# Altium PCB main_old.PcbDoc (part 13 of 15)
Units mil, origin at the board's own origin, x right, y up, seen from the top; angles counter-clockwise.
Board outline 8394.55 x 5164.44 mil, 7 copper layers (Top Layer 1, Layer 2, Layer 3, Unused, Layer 4_pow, Layer 5_gnd, Bottom 6+gnd), stack 46.112 mil thick; 363 components, 409 nets, 1750 pads, 991 vias.
Unrouted connection lines stored in the file: 1.
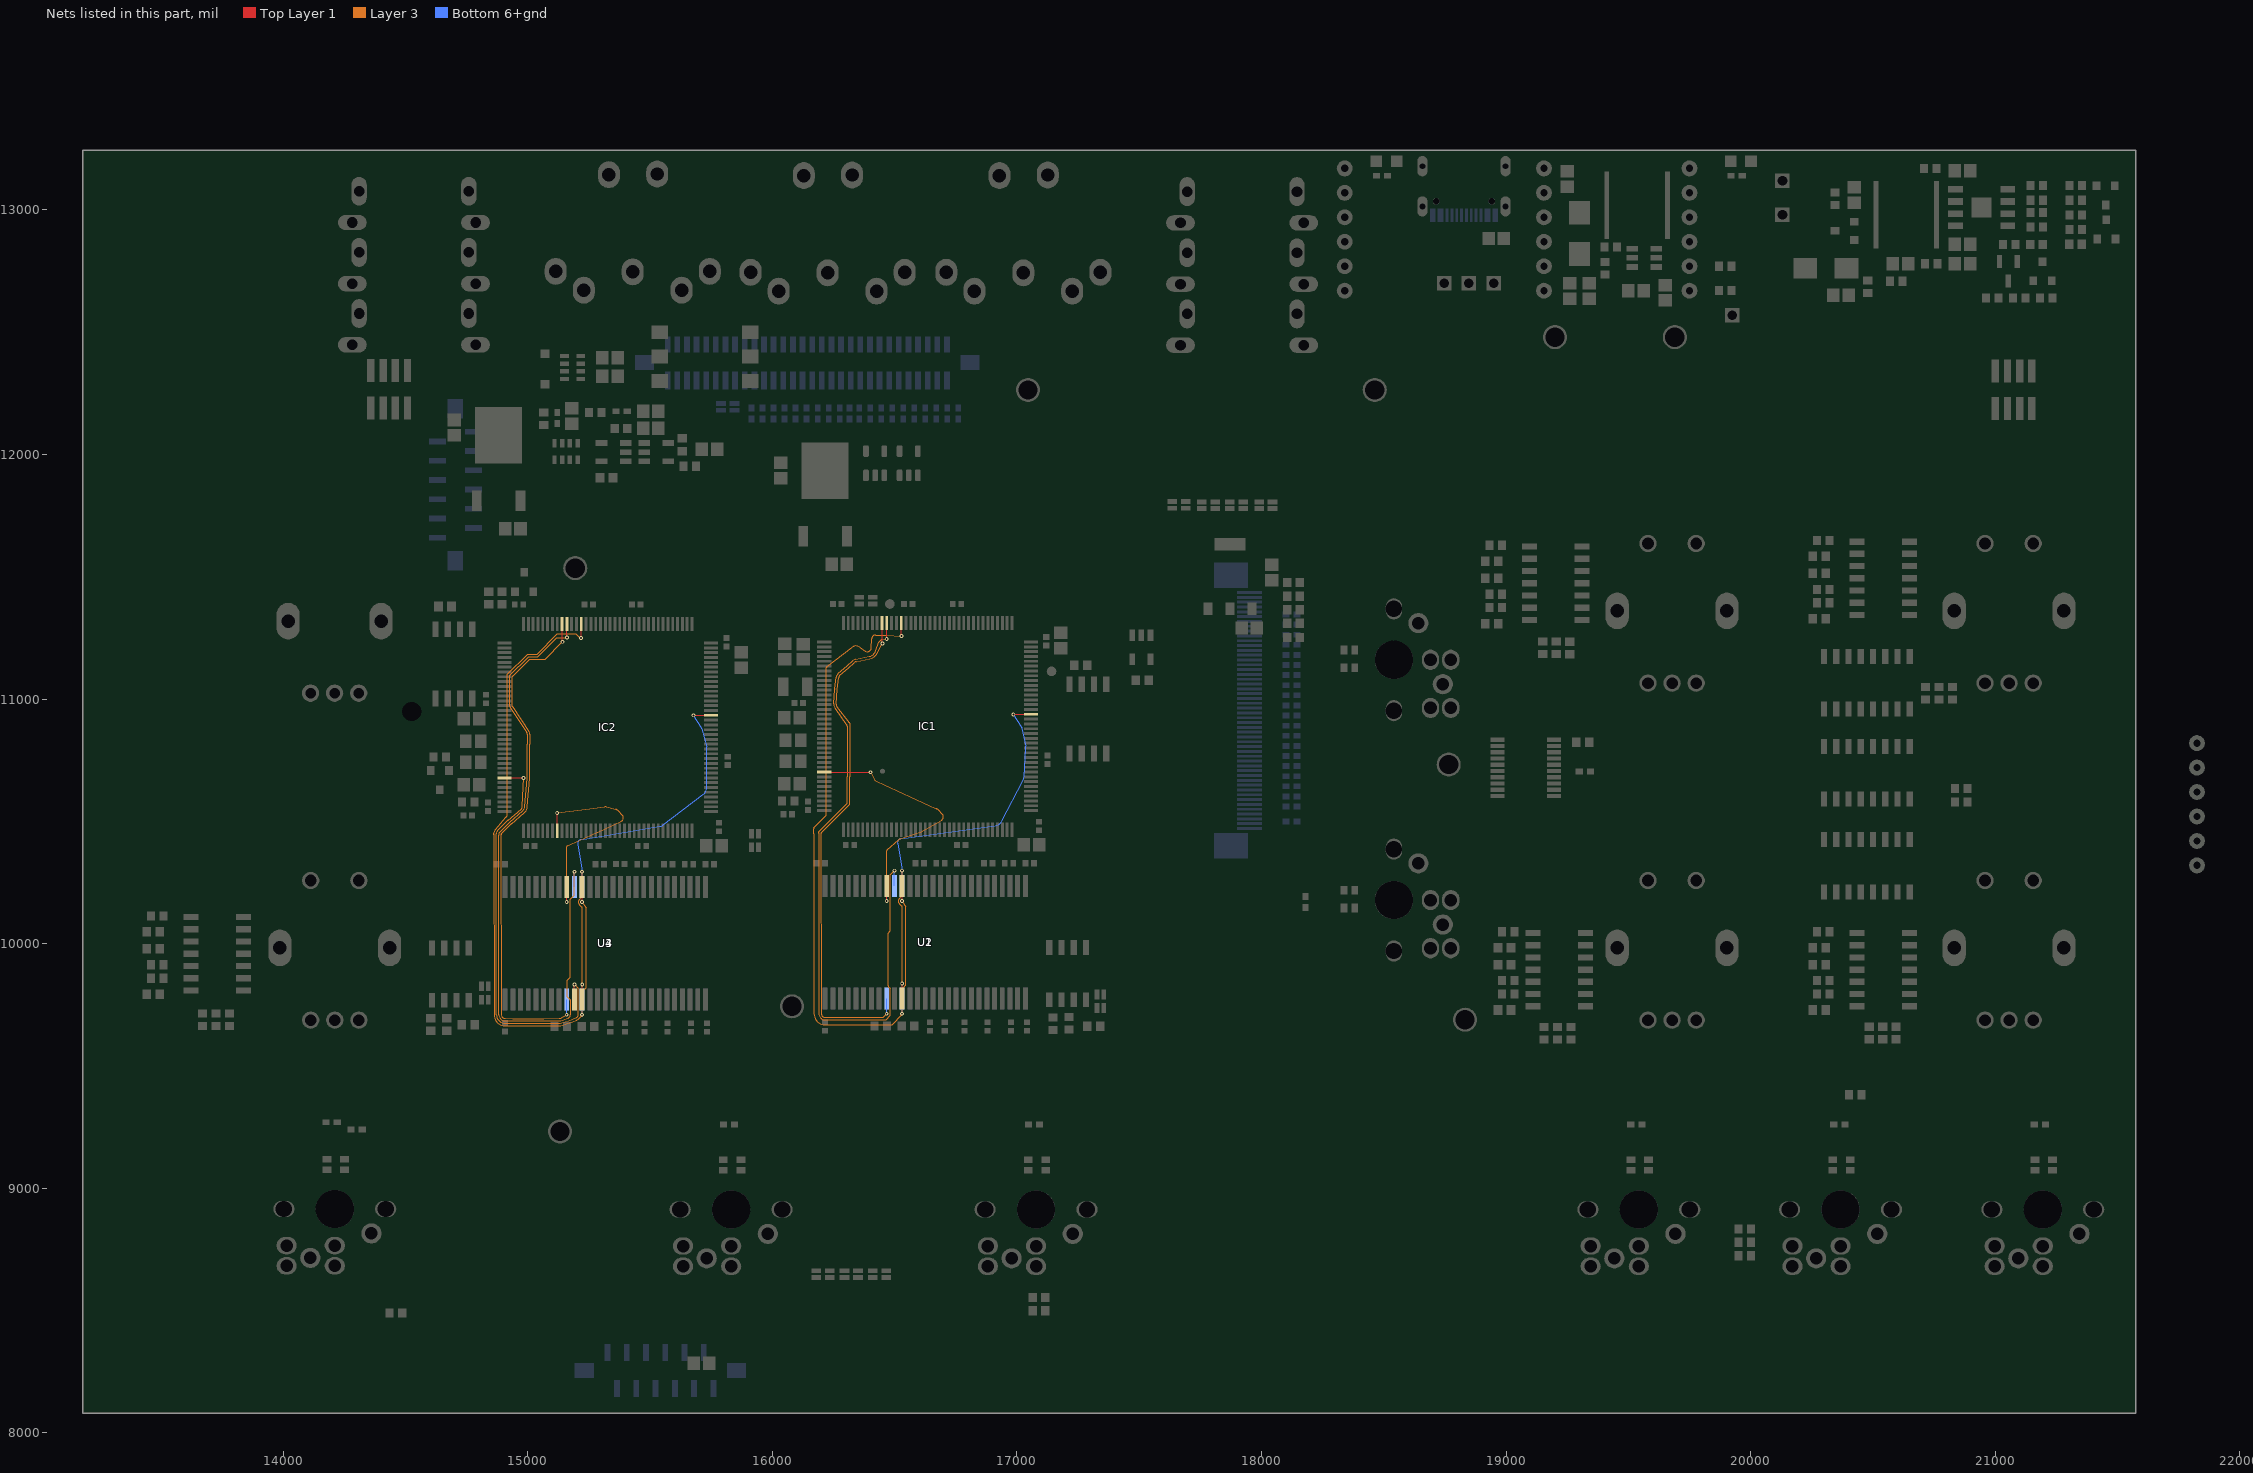
[diagram p16: the nets of this part, all layers, seen from the top]

## Via types
v1: diameter 15.75, hole 7.87, Top Layer 1 to Bottom 6+gnd, tented both sides, 923 vias
v2: diameter 27.56, hole 11.81, Top Layer 1 to Bottom 6+gnd, 45 vias
v3: diameter 23.62/23.62/23.62/23.62/23.62/23.62/23.62 (per signal layer), hole 12, Top Layer 1 to Bottom 6+gnd, tented top, 10 vias
v4: diameter 15.75, hole 7.87, Top Layer 1 to Bottom 6+gnd, 10 vias
v5: diameter 23.62/23.62/23.62/23.62/23.62/23.62/23.62 (per signal layer), hole 12, Top Layer 1 to Bottom 6+gnd, tented bottom, 3 vias

## Nets (pads, with @x,y where several pads share a name; then routed paths per layer and width w, separated by ;. In a path a pad name is that pad's centre, name@x,y a point inside that pad or via, vN(x,y) a via of type N, cw(c..) or ccw(c..) an arc to the next point about the centre after c; other vN are vias at no path point) (continued)
SDCKE_1_6: IC1.135 U2.37 | length 4722.9
  Top Layer 1 w5: v1(16467.42,11246.07) 16467.55,11246.2 16467.55,11311.45 IC1.135@16467.68,11311.57
  Layer 3 w5: 16190.01,10458.03 16304.92,10572.94 ; 16305.42,11136.34 16269.33,11104.85 ; 16305.43,11136.34 16328.74,11156.63 cw(c16345.4,11137.5) 16340.04,11162.3 16396.41,11174.48 ; 16306.39,10682.18 cw(c16291.01,10682.09) 16306.39,10681.99 ; 16465.11,9689.59 16482.65,9707.13 16482.65,9814.04 ; v1(16467.42,11246.07) 16447.1,11242.36 ccw(c16449.86,11227.24) 16435.46,11232.6 16422.09,11196.71 ; 16472.91,9827.93 ccw(c16477.91,9827.93) 16474.36,9824.4 ; v1(16498.77,10298.31) 16482.65,10282.18 16482.65,10052.46 16472.91,10042.72 16472.91,9827.92 ; 16188.55,10450.32 cw(c16198.55,10450.34) 16188.55,10450.45 ; 16188.55,10450.32 cw(c16198.55,10450.34) 16188.55,10450.45 ; 16188.55,10450.32 cw(c16198.55,10450.34) 16188.55,10450.45 ; 16188.55,10450.32 cw(c16198.55,10450.34) 16188.55,10450.45 ; 16188.55,10450.32 cw(c16198.55,10450.34) 16188.55,10450.45 ; 16188.55,10450.32 cw(c16198.55,10450.34) 16188.55,10450.45 ; 16188.55,10450.32 cw(c16198.55,10450.34) 16188.55,10450.45 ; 16188.55,10450.32 cw(c16198.55,10450.34) 16188.55,10450.45 ; 16188.55,10450.32 16190.05,9713.56 ; 16188.55,10450.45 16188.57,10454.56 ; 16188.57,10454.56 cw(c16193.57,10454.52) 16189.99,10458 ; 16188.57,10454.56 cw(c16193.57,10454.52) 16189.99,10458 ; 16188.57,10454.56 cw(c16193.57,10454.52) 16189.99,10458 ; 16188.57,10454.56 cw(c16193.57,10454.52) 16189.99,10458 ; 16188.57,10454.56 cw(c16193.57,10454.52) 16189.99,10458 ; 16188.57,10454.56 cw(c16193.57,10454.52) 16189.99,10458 ; 16188.57,10454.56 cw(c16193.57,10454.52) 16189.99,10458.01 ; 16188.57,10454.56 cw(c16193.57,10454.52) 16189.99,10458 ; 16188.57,10454.56 cw(c16193.57,10454.52) 16189.99,10458 ; 16188.57,10454.56 cw(c16193.57,10454.52) 16189.99,10458 ; 16188.57,10454.56 cw(c16193.57,10454.52) 16189.99,10458 ; 16188.57,10454.56 cw(c16193.57,10454.52) 16189.99,10458 ; 16188.57,10454.56 cw(c16193.57,10454.52) 16189.99,10458 ; 16188.57,10454.56 cw(c16193.57,10454.52) 16189.99,10458 ; 16188.57,10454.56 cw(c16193.57,10454.52) 16189.99,10458 ; 16188.57,10454.56 cw(c16193.57,10454.52) 16189.99,10458 ; 16190.05,9713.57 ccw(c16215.42,9713.62) 16215.32,9688.24 ; 16190.05,9713.57 ccw(c16215.42,9713.62) 16215.32,9688.24 ; 16190.05,9713.57 ccw(c16215.42,9713.62) 16215.32,9688.24 ; 16190.05,9713.57 ccw(c16215.42,9713.62) 16215.32,9688.24 ; 16190.05,9713.57 ccw(c16215.42,9713.62) 16215.32,9688.24 ; 16190.05,9713.57 ccw(c16215.42,9713.62) 16215.32,9688.24 ; 16190.05,9713.57 ccw(c16215.42,9713.62) 16215.32,9688.24 ; 16190.05,9713.57 ccw(c16215.42,9713.62) 16215.32,9688.24 ; 16190.05,9713.57 ccw(c16215.42,9713.62) 16215.32,9688.24 ; 16190.05,9713.57 ccw(c16215.42,9713.62) 16215.32,9688.24 ; 16190.05,9713.57 ccw(c16215.42,9713.62) 16215.32,9688.24 ; 16190.05,9713.57 ccw(c16215.42,9713.62) 16215.32,9688.24 ; 16190.05,9713.57 ccw(c16215.42,9713.62) 16215.32,9688.24 ; 16190.05,9713.57 ccw(c16215.42,9713.62) 16215.32,9688.24 ; 16190.05,9713.57 ccw(c16215.42,9713.62) 16215.32,9688.24 ; 16190.05,9713.57 ccw(c16215.42,9713.62) 16215.32,9688.24 ; 16215.32,9688.24 16246.73,9688.13 16449.84,9688.13 16461.61,9688.16 ; 16250.74,10980.39 ccw(c16276.06,10978.64) 16255.27,10964.09 ; 16250.74,10980.39 ccw(c16276.06,10978.64) 16255.27,10964.09 ; 16250.74,10980.39 ccw(c16276.06,10978.64) 16255.27,10964.09 ; 16250.74,10980.39 ccw(c16276.06,10978.64) 16255.27,10964.09 ; 16250.74,10980.39 ccw(c16276.06,10978.64) 16255.27,10964.09 ; 16250.74,10980.39 ccw(c16276.06,10978.64) 16255.27,10964.09 ; 16250.74,10980.39 ccw(c16276.06,10978.64) 16255.27,10964.09 ; 16250.74,10980.39 ccw(c16276.06,10978.64) 16255.27,10964.09 ; 16250.74,10980.39 ccw(c16276.06,10978.64) 16255.27,10964.09 ; 16250.74,10980.39 ccw(c16276.06,10978.64) 16255.27,10964.09 ; 16250.74,10980.39 ccw(c16276.06,10978.64) 16255.27,10964.09 ; 16250.74,10980.39 ccw(c16276.06,10978.64) 16255.27,10964.09 ; 16250.74,10980.39 ccw(c16276.06,10978.64) 16255.27,10964.09 ; 16250.74,10980.39 ccw(c16276.06,10978.64) 16255.27,10964.09 ; 16250.74,10980.39 ccw(c16276.06,10978.64) 16255.27,10964.09 ; 16250.74,10980.39 ccw(c16276.06,10978.64) 16255.27,10964.09 ; 16250.74,10980.39 16254.91,11040.51 cw(c16290.2,11038.08) 16255.09,11042.42 16260.83,11088.82 ; 16255.27,10964.09 16304.45,10893.68 ccw(c16308.57,10896.51) 16304.96,10893.05 cw(c16301.34,10889.6) 16306.34,10889.6 16306.39,10682.17 ; 16260.83,11088.82 cw(c16286.01,11085.73) 16269.33,11104.85 ; 16260.83,11088.82 cw(c16286.01,11085.73) 16269.33,11104.85 ; 16260.83,11088.82 cw(c16286.01,11085.73) 16269.33,11104.85 ; 16260.83,11088.82 cw(c16286.01,11085.73) 16269.33,11104.85 ; 16260.83,11088.82 cw(c16286.01,11085.73) 16269.33,11104.85 ; 16260.83,11088.82 cw(c16286.01,11085.73) 16269.33,11104.85 ; 16260.83,11088.82 cw(c16286.01,11085.73) 16269.33,11104.85 ; 16260.83,11088.82 cw(c16286.01,11085.73) 16269.33,11104.85 ; 16260.83,11088.82 cw(c16286.01,11085.73) 16269.33,11104.85 ; 16260.83,11088.82 cw(c16286.01,11085.73) 16269.33,11104.85 ; 16260.83,11088.82 cw(c16286.01,11085.73) 16269.33,11104.85 ; 16260.83,11088.82 cw(c16286.01,11085.73) 16269.33,11104.85 ; 16260.83,11088.82 cw(c16286.01,11085.73) 16269.33,11104.85 ; 16260.83,11088.82 cw(c16286.01,11085.73) 16269.33,11104.85 ; 16260.83,11088.82 cw(c16286.01,11085.73) 16269.33,11104.85 ; 16260.83,11088.82 cw(c16286.01,11085.73) 16269.33,11104.85 ; 16304.95,10572.97 ccw(c16301.35,10576.44) 16306.35,10576.44 ; 16304.95,10572.97 ccw(c16301.35,10576.44) 16306.35,10576.44 ; 16304.95,10572.97 ccw(c16301.35,10576.44) 16306.35,10576.44 ; 16304.95,10572.97 ccw(c16301.35,10576.44) 16306.35,10576.44 ; 16304.95,10572.97 ccw(c16301.35,10576.44) 16306.35,10576.44 ; 16304.95,10572.97 ccw(c16301.35,10576.44) 16306.35,10576.44 ; 16304.95,10572.97 ccw(c16301.35,10576.44) 16306.35,10576.44 ; 16304.95,10572.97 ccw(c16301.35,10576.44) 16306.35,10576.44 ; 16304.95,10572.97 ccw(c16301.35,10576.44) 16306.35,10576.44 ; 16304.95,10572.97 ccw(c16301.35,10576.44) 16306.35,10576.44 ; 16304.95,10572.97 ccw(c16301.35,10576.44) 16306.35,10576.44 ; 16304.95,10572.97 ccw(c16301.35,10576.44) 16306.35,10576.44 ; 16304.95,10572.97 ccw(c16301.35,10576.44) 16306.35,10576.44 ; 16304.95,10572.97 ccw(c16301.35,10576.44) 16306.35,10576.44 ; 16304.95,10572.97 ccw(c16301.35,10576.44) 16306.35,10576.44 ; 16304.95,10572.97 ccw(c16301.35,10576.44) 16306.35,10576.44 ; 16306.35,10576.44 16306.39,10681.99 ; 16306.39,10681.99 ccw(c16291.01,10682.09) 16306.39,10682.17 ; 16306.39,10681.99 ccw(c16291.01,10682.09) 16306.39,10682.17 ; 16306.39,10681.99 ccw(c16291.01,10682.09) 16306.39,10682.17 ; 16306.39,10681.99 ccw(c16291.01,10682.09) 16306.39,10682.17 ; 16306.39,10681.99 ccw(c16291.01,10682.09) 16306.39,10682.17 ; 16306.39,10681.99 ccw(c16291.01,10682.09) 16306.39,10682.17 ; 16306.39,10681.99 ccw(c16291.01,10682.09) 16306.39,10682.17 ; 16306.39,10681.99 ccw(c16291.01,10682.09) 16306.39,10682.17 ; 16306.39,10681.99 ccw(c16291.01,10682.09) 16306.39,10682.17 ; 16306.39,10681.99 ccw(c16291.01,10682.09) 16306.39,10682.17 ; 16306.39,10681.99 ccw(c16291.01,10682.09) 16306.39,10682.17 ; 16306.39,10681.99 ccw(c16291.01,10682.09) 16306.39,10682.17 ; 16306.39,10681.99 ccw(c16291.01,10682.09) 16306.39,10682.17 ; 16306.39,10681.99 ccw(c16291.01,10682.09) 16306.39,10682.17 ; 16306.39,10681.99 ccw(c16291.01,10682.09) 16306.39,10682.17 ; 16396.41,11174.48 ccw(c16388.94,11209.06) 16422.09,11196.71 ; 16396.41,11174.48 ccw(c16388.94,11209.06) 16422.09,11196.71 ; 16396.41,11174.48 ccw(c16388.94,11209.06) 16422.09,11196.71 ; 16396.41,11174.48 ccw(c16388.94,11209.06) 16422.09,11196.71 ; 16396.41,11174.48 ccw(c16388.94,11209.06) 16422.09,11196.71 ; 16396.41,11174.48 ccw(c16388.94,11209.06) 16422.09,11196.71 ; 16396.41,11174.48 ccw(c16388.94,11209.06) 16422.09,11196.71 ; 16396.41,11174.48 ccw(c16388.94,11209.06) 16422.09,11196.71 ; 16396.41,11174.48 ccw(c16388.94,11209.06) 16422.09,11196.71 ; 16396.41,11174.48 ccw(c16388.94,11209.06) 16422.09,11196.71 ; 16396.41,11174.48 ccw(c16388.94,11209.06) 16422.09,11196.71 ; 16396.41,11174.48 ccw(c16388.94,11209.06) 16422.09,11196.71 ; 16396.41,11174.48 ccw(c16388.94,11209.06) 16422.09,11196.71 ; 16396.41,11174.48 ccw(c16388.94,11209.06) 16422.09,11196.71 ; 16396.41,11174.48 ccw(c16388.94,11209.06) 16422.09,11196.71 ; 16396.41,11174.48 ccw(c16388.94,11209.06) 16422.09,11196.71 ; 16461.61,9688.16 ccw(c16461.6,9693.16) 16465.08,9689.57 ; 16461.61,9688.16 ccw(c16461.6,9693.16) 16465.08,9689.57 ; 16461.61,9688.16 ccw(c16461.6,9693.16) 16465.08,9689.57 ; 16461.61,9688.16 ccw(c16461.6,9693.16) 16465.08,9689.57 ; 16461.61,9688.16 ccw(c16461.6,9693.16) 16465.08,9689.57 ; 16461.61,9688.16 ccw(c16461.6,9693.16) 16465.08,9689.57 ; 16461.61,9688.16 ccw(c16461.6,9693.16) 16465.08,9689.57 ; 16461.61,9688.16 ccw(c16461.6,9693.16) 16465.08,9689.57 ; 16461.61,9688.16 ccw(c16461.6,9693.16) 16465.08,9689.57 ; 16461.61,9688.16 ccw(c16461.6,9693.16) 16465.08,9689.57 ; 16461.61,9688.16 ccw(c16461.6,9693.16) 16465.08,9689.57 ; 16461.61,9688.16 ccw(c16461.6,9693.16) 16465.08,9689.57 ; 16461.61,9688.16 ccw(c16461.6,9693.16) 16465.08,9689.57 ; 16461.61,9688.16 ccw(c16461.6,9693.16) 16465.08,9689.57 ; 16461.61,9688.16 ccw(c16461.6,9693.16) 16465.08,9689.57 ; 16461.61,9688.16 ccw(c16461.6,9693.16) 16465.08,9689.57 ; 16472.91,9827.92 ccw(c16477.91,9827.93) 16474.36,9824.4 ; 16472.91,9827.92 ccw(c16477.91,9827.93) 16474.36,9824.4 ; 16472.91,9827.92 ccw(c16477.91,9827.93) 16474.36,9824.4 ; 16472.91,9827.92 ccw(c16477.91,9827.93) 16474.36,9824.4 ; 16472.91,9827.92 ccw(c16477.91,9827.93) 16474.36,9824.4 ; 16472.91,9827.92 ccw(c16477.91,9827.93) 16474.36,9824.4 ; 16472.91,9827.92 ccw(c16477.91,9827.93) 16474.36,9824.4 ; 16472.91,9827.92 ccw(c16477.91,9827.93) 16474.36,9824.4 ; 16472.91,9827.92 ccw(c16477.91,9827.93) 16474.36,9824.4 ; 16472.91,9827.92 ccw(c16477.91,9827.93) 16474.36,9824.4 ; 16472.91,9827.92 ccw(c16477.91,9827.93) 16474.36,9824.4 ; 16472.91,9827.92 ccw(c16477.91,9827.93) 16474.36,9824.4 ; 16472.91,9827.92 ccw(c16477.91,9827.93) 16474.36,9824.4 ; 16472.91,9827.92 ccw(c16477.91,9827.93) 16474.36,9824.4 ; 16472.91,9827.92 ccw(c16477.91,9827.93) 16474.36,9824.4 ; 16474.36,9824.4 16481.2,9817.52 ; 16481.2,9817.52 cw(c16477.65,9814) 16482.65,9814.09 ; 16481.2,9817.52 cw(c16477.65,9814) 16482.65,9814.09 ; 16481.2,9817.52 cw(c16477.65,9814) 16482.65,9814.09 ; 16481.2,9817.52 cw(c16477.65,9814) 16482.65,9814.09 ; 16481.2,9817.52 cw(c16477.65,9814) 16482.65,9814.09 ; 16481.2,9817.52 cw(c16477.65,9814) 16482.65,9814.09 ; 16481.2,9817.52 cw(c16477.65,9814) 16482.65,9814.09 ; 16481.2,9817.52 cw(c16477.65,9814) 16482.65,9814.09 ; 16481.2,9817.52 cw(c16477.65,9814) 16482.65,9814.09 ; 16481.2,9817.52 cw(c16477.65,9814) 16482.65,9814.09 ; 16481.2,9817.52 cw(c16477.65,9814) 16482.65,9814.09 ; 16481.2,9817.52 cw(c16477.65,9814) 16482.65,9814.09 ; 16481.2,9817.52 cw(c16477.65,9814) 16482.65,9814.09 ; 16481.2,9817.52 cw(c16477.65,9814) 16482.65,9814.09 ; 16481.2,9817.52 cw(c16477.65,9814) 16482.65,9814.09 ; 16481.2,9817.52 cw(c16477.65,9814) 16482.65,9814.09
  Bottom 6+gnd w5: U2.37@16499.02,10236.22 v1@16499.02,10298.06
SDCKE_01_7: IC2.29 U3.37 | length 1647.9
  Top Layer 1 w5: IC2.29@14904,10677.94 v1(14982.71,10677.89) ; U3.37@15190.72,9771.4 v1@15190.72,9833.24
  Layer 3 w5: 14870.25,10445.04 14870.25,10447.12 cw(c14875.25,10447.09) 14870.36,10448.17 14870.86,10450.43 cw(c14895.27,10445.04) 14877.6,10462.72 14918.75,10503.84 cw(c14943.5,10479.09) 14920.61,10505.57 14972.62,10550.55 ccw(c14962.57,10562.18) 14977.93,10561.54 v1(14982.71,10677.89) ; 14871.75,10443.52 14871.75,9709.36 ccw(c14907.12,9709.43) 14907.18,9674.05 14938.29,9674.05 14938.41,9673.94 ; 14938.44,9673.94 15064.55,9673.94 ; 15064.58,9673.94 15127.57,9674.1 ccw(c15127.48,9709.47) 15138.51,9675.86 15166.91,9685.21 ; 15168.06,9685.62 15195.98,9696.33 ccw(c15190.47,9710.69) 15201.42,9699.89 15204.4,9702.91 ; v1(15190.96,9833.49) 15205.84,9818.6 15205.84,9704.36 15204.42,9702.94
SDCKE_11_7: IC2.135 U4.37 | length 2788.7
  Top Layer 1 w5: IC2.135@15159.44,11307.38 15159.68,11307.08 15159.68,11252.37 v1(15159.99,11252.06)
  Layer 3 w5: 14926.7,11096.08 14926.7,11090.84 ccw(c14941.7,11090.76) 14926.7,11090.76 14926.7,10971.7 ccw(c14941.7,10971.71) 14929.21,10963.4 14995.45,10863.86 cw(c14982.71,10855.26) 14998.09,10855.26 14998.09,10815.26 14998.09,10677.9 cw(c14982.71,10677.9) 14998.04,10676.74 14998.04,10676.67 cw(c14982.71,10677.89) 14998.03,10676.56 14987.84,10559.97 cw(c14962.57,10562.18) 14979.16,10542.98 14927.16,10498.01 ccw(c14943.5,10479.09) 14925.84,10496.78 14884.67,10455.65 ccw(c14895.27,10445.04) 14880.27,10445.01 14881.47,10443.82 cw(c14871.75,10441.47) 14881.75,10441.47 14881.75,9709.38 ccw(c14907.12,9709.43) 14907.21,9684.05 14938.32,9684.05 14938.43,9683.94 ccw(c14938.5,9709.31) 14938.5,9683.94 15064.53,9683.94 15127.58,9684.1 ccw(c15127.48,9709.47) 15135.41,9685.37 15163.75,9694.7 ccw(c15158.97,9709.31) 15174.35,9709.38 15174.3,9767.94 ccw(c15169.3,9767.94) 15172.93,9771.38 15172.88,9771.43 15161.7,9782.61 15161.7,9849.63 15174.35,9862.28 15174.35,10182.28 15175.79,10183.72 15189.01,10196.98 ccw(c15185.47,10200.52) 15190.47,10200.43 v1(15190.47,10294.12) ; 14926.73,11096.11 cw(c14931.73,11096.08) 14926.91,11097.41 15003.21,11173.71 15040.97,11173.71 15117.26,11250.01 15157.93,11250.01 v1(15159.99,11252.06)
  Bottom 6+gnd w5: U4.37@15190.72,10232.03 v1@15190.72,10293.87
SDCLK1_7: IC2.93 U3.38 U4.38 | length 2925
  Top Layer 1 w5: U3.38@15222.21,9771.4 v1@15222.21,9833.24 ; v1@15676.86,10933.84 IC2.93@15749.52,10933.84
  Layer 3 w5: v1(15221.97,10294.12) 15222.46,10293.63 15222.46,10195.56 ; v1(15222.46,9833.49) 15222.46,10145.64 ; 15221,10149.12 cw(c15217.46,10145.59) 15222.46,10145.68 ; 15221,10149.12 cw(c15217.46,10145.59) 15222.46,10145.68 ; 15221,10149.12 cw(c15217.46,10145.59) 15222.46,10145.68 ; 15221,10149.12 cw(c15217.46,10145.59) 15222.46,10145.68 ; 15221,10149.12 cw(c15217.46,10145.59) 15222.46,10145.68 ; 15221,10149.12 cw(c15217.46,10145.59) 15222.46,10145.68 ; 15221,10149.12 cw(c15217.46,10145.59) 15222.46,10145.68 ; 15221,10149.12 cw(c15217.46,10145.59) 15222.46,10145.68 ; 15221,10149.12 cw(c15217.46,10145.59) 15222.46,10145.68 ; 15221,10149.12 cw(c15217.46,10145.59) 15222.46,10145.68 ; 15221,10149.12 cw(c15217.46,10145.59) 15222.46,10145.68 ; 15221,10149.12 cw(c15217.46,10145.59) 15222.46,10145.68 ; 15221,10149.12 cw(c15217.46,10145.59) 15222.46,10145.68 ; 15221,10149.12 cw(c15217.46,10145.59) 15222.46,10145.68 ; 15221,10149.12 cw(c15217.46,10145.59) 15222.46,10145.68 ; 15221,10149.12 cw(c15217.46,10145.59) 15222.46,10145.68 ; 15221,10149.12 15211.07,10159.1 cw(c15221.97,10169.94) 15210.44,10180.12 15221.2,10192.29 ; 15221.2,10192.29 ccw(c15217.46,10195.6) 15222.46,10195.51 ; 15221.2,10192.29 ccw(c15217.46,10195.6) 15222.46,10195.51 ; 15221.2,10192.29 ccw(c15217.46,10195.6) 15222.46,10195.51 ; 15221.2,10192.29 ccw(c15217.46,10195.6) 15222.46,10195.51 ; 15221.2,10192.29 ccw(c15217.46,10195.6) 15222.46,10195.51 ; 15221.2,10192.29 ccw(c15217.46,10195.6) 15222.46,10195.51 ; 15221.2,10192.29 ccw(c15217.46,10195.6) 15222.46,10195.51 ; 15221.2,10192.29 ccw(c15217.46,10195.6) 15222.46,10195.51 ; 15221.2,10192.29 ccw(c15217.46,10195.6) 15222.46,10195.51 ; 15221.2,10192.29 ccw(c15217.46,10195.6) 15222.46,10195.51 ; 15221.2,10192.29 ccw(c15217.46,10195.6) 15222.46,10195.51 ; 15221.2,10192.29 ccw(c15217.46,10195.6) 15222.46,10195.51 ; 15221.2,10192.29 ccw(c15217.46,10195.6) 15222.46,10195.51 ; 15221.2,10192.29 ccw(c15217.46,10195.6) 15222.46,10195.51 ; 15221.2,10192.29 ccw(c15217.46,10195.6) 15222.46,10195.51 ; 15221.2,10192.29 ccw(c15217.46,10195.6) 15222.46,10195.51
  Bottom 6+gnd w5: v1@15221.72,10294.36 v1(15221.97,10294.12) U4.38@15221.97,10232.28 ; v1@15676.53,10934.01 v1(15676.78,10933.76) 15709.7,10882.73 cw(c15696.78,10874.39) 15711.65,10878.3 15730.99,10804.64 cw(c15696.78,10795.65) 15732.15,10795.65 15732.15,10638.17 ; 15203.31,10406.96 cw(c15218.49,10409.41) 15215.97,10424.58 ; 15203.31,10406.96 cw(c15218.49,10409.41) 15215.97,10424.58 ; 15203.31,10406.96 cw(c15218.49,10409.41) 15215.97,10424.58 ; 15203.31,10406.96 cw(c15218.49,10409.41) 15215.97,10424.58 ; 15203.31,10406.96 cw(c15218.49,10409.41) 15215.97,10424.58 ; 15203.31,10406.96 cw(c15218.49,10409.41) 15215.97,10424.58 ; 15203.31,10406.96 cw(c15218.49,10409.41) 15215.97,10424.58 ; 15203.31,10406.96 cw(c15218.49,10409.41) 15215.97,10424.58 ; 15203.31,10406.96 cw(c15218.49,10409.41) 15215.97,10424.58 ; 15203.31,10406.96 cw(c15218.49,10409.41) 15215.97,10424.58 ; 15203.31,10406.96 cw(c15218.49,10409.41) 15215.97,10424.58 ; 15203.31,10406.96 cw(c15218.49,10409.41) 15215.97,10424.58 ; 15203.31,10406.96 cw(c15218.49,10409.41) 15215.97,10424.58 ; 15203.31,10406.96 cw(c15218.49,10409.41) 15215.97,10424.58 ; 15203.31,10406.96 cw(c15218.49,10409.41) 15215.97,10424.58 ; 15203.31,10406.96 cw(c15218.49,10409.41) 15215.97,10424.58 ; 15203.31,10406.96 v1@15221.78,10294.89 ; 15215.97,10424.58 15539.09,10479.52 ; v1@15221.78,10294.88 ccw(c15226.72,10295.67) v1(15221.97,10294.12) ; v1@15221.78,10294.89 ccw(c15226.72,10295.67) v1(15221.97,10294.12) ; v1@15221.78,10294.88 ccw(c15226.72,10295.67) v1(15221.97,10294.12) ; v1@15221.78,10294.88 ccw(c15226.72,10295.67) v1(15221.97,10294.12) ; v1@15221.78,10294.88 ccw(c15226.72,10295.67) v1(15221.97,10294.12) ; v1@15221.78,10294.88 ccw(c15226.72,10295.67) v1(15221.97,10294.12) ; v1@15221.78,10294.88 ccw(c15226.72,10295.67) v1(15221.97,10294.12) ; v1@15221.78,10294.88 ccw(c15226.72,10295.67) v1(15221.97,10294.12) ; v1@15221.78,10294.88 ccw(c15226.72,10295.67) v1(15221.97,10294.12) ; v1@15221.78,10294.88 ccw(c15226.72,10295.67) v1(15221.97,10294.12) ; v1@15221.78,10294.88 ccw(c15226.72,10295.67) v1(15221.97,10294.12) ; v1@15221.78,10294.88 ccw(c15226.72,10295.67) v1(15221.97,10294.12) ; v1@15221.78,10294.88 ccw(c15226.72,10295.67) v1(15221.97,10294.12) ; v1@15221.78,10294.88 ccw(c15226.72,10295.67) v1(15221.97,10294.12) ; v1@15221.78,10294.88 ccw(c15226.72,10295.67) v1(15221.97,10294.12) ; v1@15221.78,10294.88 ccw(c15226.72,10295.67) v1(15221.97,10294.12) ; 15539.09,10479.52 ccw(c15533.16,10514.39) 15554.48,10486.17 ; 15539.09,10479.52 ccw(c15533.16,10514.39) 15554.48,10486.17 ; 15539.09,10479.52 ccw(c15533.16,10514.39) 15554.48,10486.17 ; 15539.09,10479.52 ccw(c15533.16,10514.39) 15554.48,10486.17 ; 15539.09,10479.52 ccw(c15533.16,10514.39) 15554.48,10486.17 ; 15539.09,10479.52 ccw(c15533.16,10514.39) 15554.48,10486.17 ; 15539.09,10479.52 ccw(c15533.16,10514.39) 15554.48,10486.17 ; 15539.09,10479.52 ccw(c15533.16,10514.39) 15554.48,10486.17 ; 15539.09,10479.52 ccw(c15533.16,10514.39) 15554.48,10486.17 ; 15539.09,10479.52 ccw(c15533.16,10514.39) 15554.48,10486.17 ; 15539.09,10479.52 ccw(c15533.16,10514.39) 15554.48,10486.17 ; 15539.09,10479.52 ccw(c15533.16,10514.39) 15554.48,10486.17 ; 15539.09,10479.52 ccw(c15533.16,10514.39) 15554.48,10486.17 ; 15539.09,10479.52 ccw(c15533.16,10514.39) 15554.48,10486.17 ; 15539.09,10479.52 ccw(c15533.16,10514.39) 15554.48,10486.17 ; 15539.09,10479.52 ccw(c15533.16,10514.39) 15554.48,10486.17 ; 15554.48,10486.17 15718.12,10609.96 ; 15718.12,10609.96 ccw(c15696.78,10638.17) 15732.15,10638.17 ; 15718.12,10609.96 ccw(c15696.78,10638.17) 15732.15,10638.17 ; 15718.12,10609.96 ccw(c15696.78,10638.17) 15732.15,10638.17 ; 15718.12,10609.96 ccw(c15696.78,10638.17) 15732.15,10638.17 ; 15718.12,10609.96 ccw(c15696.78,10638.17) 15732.15,10638.17 ; 15718.12,10609.96 ccw(c15696.78,10638.17) 15732.15,10638.17 ; 15718.12,10609.96 ccw(c15696.78,10638.17) 15732.15,10638.17 ; 15718.12,10609.96 ccw(c15696.78,10638.17) 15732.15,10638.17 ; 15718.12,10609.96 ccw(c15696.78,10638.17) 15732.15,10638.17 ; 15718.12,10609.96 ccw(c15696.78,10638.17) 15732.15,10638.17 ; 15718.12,10609.96 ccw(c15696.78,10638.17) 15732.15,10638.17 ; 15718.12,10609.96 ccw(c15696.78,10638.17) 15732.15,10638.17 ; 15718.12,10609.96 ccw(c15696.78,10638.17) 15732.15,10638.17 ; 15718.12,10609.96 ccw(c15696.78,10638.17) 15732.15,10638.17 ; 15718.12,10609.96 ccw(c15696.78,10638.17) 15732.15,10638.17 ; 15718.12,10609.96 ccw(c15696.78,10638.17) 15732.15,10638.17
SDCLK_6: IC1.93 U1.38 U2.38 | length 1937.3
  Top Layer 1 w5: U1.38@16530.51,9775.59 v1@16530.51,9837.43 ; U1.38@16530.76,9775.83 v1(16530.76,9837.68) ; U1.38@16531,9775.59 v1@16531,9837.43 ; v1(16985.08,10936.97) 16985.61,10937.5 17057.23,10937.5 IC1.93@17057.76,10938.03
  Layer 3 w5: v1(16530.27,10298.31) 16530.76,10297.82 16530.76,10199.75 ; v1(16530.76,9837.68) 16530.76,10149.83 ; 16529.3,10153.31 cw(c16525.76,10149.78) 16530.76,10149.87 ; 16529.3,10153.31 cw(c16525.76,10149.78) 16530.76,10149.87 ; 16529.3,10153.31 cw(c16525.76,10149.78) 16530.76,10149.87 ; 16529.3,10153.31 cw(c16525.76,10149.78) 16530.76,10149.87 ; 16529.3,10153.31 cw(c16525.76,10149.78) 16530.76,10149.87 ; 16529.3,10153.31 cw(c16525.76,10149.78) 16530.76,10149.87 ; 16529.3,10153.31 cw(c16525.76,10149.78) 16530.76,10149.87 ; 16529.3,10153.31 cw(c16525.76,10149.78) 16530.76,10149.87 ; 16529.3,10153.31 cw(c16525.76,10149.78) 16530.76,10149.87 ; 16529.3,10153.31 cw(c16525.76,10149.78) 16530.76,10149.87 ; 16529.3,10153.31 cw(c16525.76,10149.78) 16530.76,10149.87 ; 16529.3,10153.31 cw(c16525.76,10149.78) 16530.76,10149.87 ; 16529.3,10153.31 cw(c16525.76,10149.78) 16530.76,10149.87 ; 16529.3,10153.31 cw(c16525.76,10149.78) 16530.76,10149.87 ; 16529.3,10153.31 cw(c16525.76,10149.78) 16530.76,10149.87 ; 16529.3,10153.31 cw(c16525.76,10149.78) 16530.76,10149.87 ; 16529.3,10153.31 16519.37,10163.28 cw(c16530.27,10174.13) 16518.74,10184.31 16529.5,10196.48 ; 16529.5,10196.48 ccw(c16525.76,10199.79) 16530.76,10199.7 ; 16529.5,10196.48 ccw(c16525.76,10199.79) 16530.76,10199.7 ; 16529.5,10196.48 ccw(c16525.76,10199.79) 16530.76,10199.7 ; 16529.5,10196.48 ccw(c16525.76,10199.79) 16530.76,10199.7 ; 16529.5,10196.48 ccw(c16525.76,10199.79) 16530.76,10199.7 ; 16529.5,10196.48 ccw(c16525.76,10199.79) 16530.76,10199.7 ; 16529.5,10196.48 ccw(c16525.76,10199.79) 16530.76,10199.7 ; 16529.5,10196.48 ccw(c16525.76,10199.79) 16530.76,10199.7 ; 16529.5,10196.48 ccw(c16525.76,10199.79) 16530.76,10199.7 ; 16529.5,10196.48 ccw(c16525.76,10199.79) 16530.76,10199.7 ; 16529.5,10196.48 ccw(c16525.76,10199.79) 16530.76,10199.7 ; 16529.5,10196.48 ccw(c16525.76,10199.79) 16530.76,10199.7 ; 16529.5,10196.48 ccw(c16525.76,10199.79) 16530.76,10199.7 ; 16529.5,10196.48 ccw(c16525.76,10199.79) 16530.76,10199.7 ; 16529.5,10196.48 ccw(c16525.76,10199.79) 16530.76,10199.7 ; 16529.5,10196.48 ccw(c16525.76,10199.79) 16530.76,10199.7
  Bottom 6+gnd w5: v1(16530.27,10298.31) 16511.62,10411.09 cw(c16526.79,10413.6) 16524.76,10428.84 16911.91,10482.16 ccw(c16907.09,10517.2) 16938.55,10501.03 17025.21,10669.08 17025.26,10669.17 ; v1(16530.27,10298.31) cw(c16525.49,10296.84) 16530.49,10296.85 16530.49,10278.72 U2.38@16530.51,10236.22 ; v1(16985.08,10936.97) 16985.24,10936.97 16985.53,10937.26 17017.71,10887.36 17018.38,10886.54 17020.14,10884.77 17020.14,10882.16 17020.24,10881.16 17035.44,10806.77 cw(c17000.78,10799.69) 17036.08,10797.5 17029.15,10683.33 cw(c16993.84,10685.43) 17025.26,10669.18
SDNCAS1_7: IC2.132 U3.17 U4.17 | length 2842.8
  Top Layer 1 w5: v1(15216.7,11249.63) 15217.57,11250.49 15217.57,11306.52 IC2.132@15218.43,11307.38 ; v1@15222.21,10170.19 U3.17@15222.21,10232.03
  Layer 3 w5: v1(15216.7,11249.63) 15213.79,11249.63 15195.98,11267.44 15120.55,11267.44 15037.51,11184.39 14999.75,11184.39 14916.7,11101.34 14916.7,11090.87 ccw(c14941.7,11090.76) 14916.7,11090.76 14916.7,10526.7 cw(c14911.7,10526.73) 14915.74,10523.79 14911.87,10518.48 cw(c14891.67,10533.22) 14910.68,10516.98 14868.66,10467.77 ccw(c14895.27,10445.04) 14861.1,10452.59 14860.6,10450.33 ccw(c14875.25,10447.09) 14860.25,10447.17 14860.25,10444.94 14861.75,9709.37 ccw(c14907.12,9709.43) 14907.12,9664.05 14938.25,9664.05 14938.37,9663.94 ccw(c14938.46,9673.94) 14938.46,9663.94 15064.58,9663.94 15064.76,9664.1 15127.61,9664.1 ccw(c15127.48,9709.47) 15141.68,9666.38 15169.99,9675.7 15170.04,9675.71 ccw(c15158.97,9709.31) 15171.67,9676.29 15199.56,9686.99 ccw(c15190.47,9710.69) 15208.38,9692.71 15220.61,9704.94 ccw(c15217.07,9708.48) 15222.07,9708.48 15222.07,9803.1 15238.09,9819.12 15238.09,10147.71 15236.92,10148.98 v1(15221.97,10169.94)
  Bottom 6+gnd w5: v1(15222.07,9709.31) 15222.07,9771.26 U4.17@15222.21,9771.4
SDNCAS_6: IC1.132 U1.17 U2.17 | length 3066.5
  Top Layer 1 w5: IC1.132@16526.73,11311.57 16527.07,11311.24 16527.07,11257.92 v1(16527.4,11257.59) ; v1(16530.27,10174.13) U1.17@16530.27,10235.97 ; v1@16530.51,10174.38 U1.17@16530.51,10236.22
  Layer 3 w5: 16168.55,10459.17 16168.55,10450.3 16170.05,9713.52 ccw(c16215.42,9713.62) 16215.22,9668.24 16246.64,9668.13 16481.49,9667.93 ; 16168.55,10459.21 16168.57,10470.72 ; 16489.16,9669.38 cw(c16485.67,9672.96) 16485.71,9667.96 16481.6,9667.93 ; 16489.18,9669.4 16530.37,9710.59 16530.37,9813.48 cw(c16535.37,9813.48) 16531.82,9817 16541.64,9826.82 ccw(c16530.76,9837.68) 16541.71,9826.89 16544.69,9829.91 ; v1(16527.4,11257.59) 16468.41,11261.41 ccw(c16467.42,11246.07) 16467.59,11261.44 16422.03,11261.95 ccw(c16421.86,11246.58) 16406.51,11247.44 16404.29,11208.19 cw(c16388.94,11209.06) 16380.27,11196.35 16356.47,11212.73 ccw(c16342.09,11191.83) 16326.6,11211.93 16222.63,11131.98 ccw(c16225.68,11128.01) 16220.68,11128.01 16220.68,10524.89 16170.01,10474.22 ; v1(16530.27,10174.13) 16538.57,10160.47 ; 16546.13,10150.23 16546.13,9833.33 ; 16168.57,10470.72 cw(c16173.57,10470.71) 16169.99,10474.19 ; 16168.57,10470.72 cw(c16173.57,10470.71) 16169.99,10474.19 ; 16168.57,10470.72 cw(c16173.57,10470.71) 16169.99,10474.19 ; 16168.57,10470.72 cw(c16173.57,10470.71) 16169.99,10474.19 ; 16168.57,10470.72 cw(c16173.57,10470.71) 16169.99,10474.19 ; 16481.49,9667.93 ccw(c16481.5,9682.93) 16481.6,9667.93 ; 16481.49,9667.93 ccw(c16481.5,9682.93) 16481.6,9667.93 ; 16481.49,9667.93 ccw(c16481.5,9682.93) 16481.6,9667.93 ; 16481.49,9667.93 ccw(c16481.5,9682.93) 16481.6,9667.93 ; 16481.49,9667.93 ccw(c16481.5,9682.93) 16481.6,9667.93 ; 16481.49,9667.93 ccw(c16481.5,9682.93) 16481.6,9667.93 ; 16481.49,9667.93 ccw(c16481.5,9682.93) 16481.6,9667.93 ; 16481.49,9667.93 ccw(c16481.5,9682.93) 16481.6,9667.93 ; 16481.49,9667.93 ccw(c16481.5,9682.93) 16481.6,9667.93 ; 16481.49,9667.93 ccw(c16481.5,9682.93) 16481.6,9667.93 ; 16481.49,9667.93 ccw(c16481.5,9682.93) 16481.6,9667.93 ; 16481.49,9667.93 ccw(c16481.5,9682.93) 16481.6,9667.93 ; 16481.49,9667.93 ccw(c16481.5,9682.93) 16481.6,9667.93 ; 16481.49,9667.93 ccw(c16481.5,9682.93) 16481.6,9667.93 ; 16481.49,9667.93 ccw(c16481.5,9682.93) 16481.6,9667.93 ; 16481.49,9667.93 ccw(c16481.5,9682.93) 16481.6,9667.93 ; 16538.57,10160.47 ccw(c16551.39,10168.26) 16540.72,10157.71 ; 16538.57,10160.47 ccw(c16551.39,10168.26) 16540.72,10157.71 ; 16538.57,10160.47 ccw(c16551.39,10168.26) 16540.73,10157.71 16544.69,10153.7 ; 16538.57,10160.47 ccw(c16551.39,10168.26) 16540.72,10157.71 ; 16538.57,10160.47 ccw(c16551.39,10168.26) 16540.72,10157.71 ; 16544.7,9829.92 ccw(c16541.13,9833.42) 16546.13,9833.33 ; 16544.7,9829.92 ccw(c16541.13,9833.42) 16546.13,9833.33 ; 16544.7,9829.92 ccw(c16541.13,9833.42) 16546.13,9833.33 ; 16544.7,9829.92 ccw(c16541.13,9833.42) 16546.13,9833.33 ; 16544.7,9829.92 ccw(c16541.13,9833.42) 16546.13,9833.33 ; 16544.7,9829.92 ccw(c16541.13,9833.42) 16546.13,9833.33 ; 16544.7,9829.92 ccw(c16541.13,9833.42) 16546.13,9833.33 ; 16544.7,9829.92 ccw(c16541.13,9833.42) 16546.13,9833.33 ; 16544.69,10153.7 cw(c16541.13,10150.19) 16546.13,10150.28 ; 16544.69,10153.7 cw(c16541.13,10150.19) 16546.13,10150.28 ; 16544.69,10153.7 cw(c16541.13,10150.19) 16546.13,10150.28 ; 16544.69,10153.7 cw(c16541.13,10150.19) 16546.13,10150.28 ; 16544.69,10153.7 cw(c16541.13,10150.19) 16546.13,10150.28 ; 16544.69,10153.7 cw(c16541.13,10150.19) 16546.13,10150.28 ; 16544.69,10153.7 cw(c16541.13,10150.19) 16546.13,10150.28 ; 16544.69,10153.7 cw(c16541.13,10150.19) 16546.13,10150.28 ; 16544.69,10153.7 cw(c16541.13,10150.19) 16546.13,10150.28 ; 16544.69,10153.7 cw(c16541.13,10150.19) 16546.13,10150.28 ; 16544.69,10153.7 cw(c16541.13,10150.19) 16546.13,10150.28 ; 16544.69,10153.7 cw(c16541.13,10150.19) 16546.13,10150.28 ; 16544.69,10153.7 cw(c16541.13,10150.19) 16546.13,10150.28 ; 16544.69,10153.7 cw(c16541.13,10150.19) 16546.13,10150.28 ; 16544.69,10153.7 cw(c16541.13,10150.19) 16546.13,10150.28 ; 16544.69,10153.7 cw(c16541.13,10150.19) 16546.13,10150.28
  Bottom 6+gnd w5: v1(16530.37,9713.5) 16530.37,9775.45 U2.17@16530.51,9775.59
SDNE_0_6: IC1.28 U1.19 | length 1361.9
  Top Layer 1 w5: IC1.28@16212.24,10701.81 16212.76,10701.3 16401.33,10701.3 v1(16401.84,10700.78) ; v1@16467.52,10174.38 U1.19@16467.52,10236.22
  Layer 3 w5: v1(16401.84,10700.78) 16414.44,10675.75 ; v1(16467.27,10174.13) 16467.27,10379.36 ; 16414.44,10675.75 ccw(c16437.09,10687.2) 16426.49,10664.15 ; 16414.44,10675.75 ccw(c16437.09,10687.2) 16426.49,10664.15 ; 16426.49,10664.15 16670.99,10552.57 ; 16467.27,10379.36 cw(c16472.28,10379.36) 16468.96,10383.1 ; 16467.27,10379.36 cw(c16472.28,10379.36) 16468.96,10383.1 ; 16467.27,10379.36 cw(c16472.28,10379.36) 16468.96,10383.1 ; 16467.27,10379.36 cw(c16472.28,10379.36) 16468.96,10383.1 ; 16467.27,10379.36 cw(c16472.28,10379.36) 16468.96,10383.1 ; 16467.27,10379.36 cw(c16472.28,10379.36) 16468.96,10383.1 ; 16467.27,10379.36 cw(c16472.28,10379.36) 16468.96,10383.1 ; 16467.27,10379.36 cw(c16472.28,10379.36) 16468.96,10383.1 ; 16467.27,10379.36 cw(c16472.28,10379.36) 16468.96,10383.1 ; 16467.27,10379.36 cw(c16472.28,10379.36) 16468.96,10383.1 ; 16467.27,10379.36 cw(c16472.28,10379.36) 16468.96,10383.1 ; 16467.27,10379.36 cw(c16472.28,10379.36) 16468.96,10383.1 ; 16467.27,10379.36 cw(c16472.28,10379.36) 16468.96,10383.1 ; 16467.27,10379.36 cw(c16472.28,10379.36) 16468.96,10383.1 ; 16467.27,10379.36 cw(c16472.28,10379.36) 16468.97,10383.11 ; 16467.27,10379.36 cw(c16472.28,10379.36) 16468.97,10383.11 ; 16468.97,10383.11 16516.62,10425.13 cw(c16526.79,10413.6) 16522.14,10428.25 16590.43,10450.53 ; 16590.43,10450.54 ccw(c16567.09,10522.2) 16603.74,10456.34 ; 16590.43,10450.54 ccw(c16567.09,10522.2) 16603.74,10456.34 ; 16590.43,10450.54 ccw(c16567.09,10522.2) 16603.74,10456.34 ; 16590.43,10450.54 ccw(c16567.09,10522.2) 16603.74,10456.34 ; 16590.43,10450.54 ccw(c16567.09,10522.2) 16603.74,10456.34 ; 16590.43,10450.54 ccw(c16567.09,10522.2) 16603.74,10456.34 ; 16590.43,10450.54 ccw(c16567.09,10522.2) 16603.74,10456.34 ; 16590.43,10450.54 ccw(c16567.09,10522.2) 16603.74,10456.34 ; 16603.74,10456.34 16691.45,10505.15 ccw(c16683.98,10518.58) 16695.02,10529.28 16675.65,10549.28 ; 16671,10552.56 cw(c16664.61,10538.58) 16675.65,10549.28 ; 16671,10552.56 cw(c16664.61,10538.58) 16675.65,10549.28 ; 16671,10552.56 cw(c16664.61,10538.58) 16675.65,10549.28 ; 16670.99,10552.57 cw(c16664.61,10538.58) 16675.65,10549.28 ; 16671,10552.56 cw(c16664.61,10538.58) 16675.65,10549.28 ; 16671,10552.56 cw(c16664.61,10538.58) 16675.65,10549.28 ; 16670.99,10552.57 cw(c16664.61,10538.58) 16675.65,10549.28 ; 16670.99,10552.57 cw(c16664.61,10538.58) 16675.65,10549.28 ; 16670.99,10552.57 cw(c16664.61,10538.58) 16675.65,10549.28 ; 16671,10552.56 cw(c16664.61,10538.58) 16675.65,10549.28 ; 16671,10552.56 cw(c16664.61,10538.58) 16675.65,10549.28 ; 16671,10552.56 cw(c16664.61,10538.58) 16675.65,10549.28 ; 16670.99,10552.57 cw(c16664.61,10538.58) 16675.65,10549.28 ; 16670.99,10552.57 cw(c16664.61,10538.58) 16675.65,10549.28 ; 16670.99,10552.57 cw(c16664.61,10538.58) 16675.65,10549.28 ; 16670.99,10552.57 cw(c16664.61,10538.58) 16675.65,10549.28
SDNE_1_6: IC1.136 U2.19 | length 3410.9
  Top Layer 1 w5: IC1.136@16447.99,11311.57 16448.93,11310.64 16448.93,11228.17 v1(16449.86,11227.23)
  Layer 3 w5: 16314.6,10904.28 ccw(c16318.57,10907.32) 16314.96,10903.85 ; 16314.92,10568.8 16199.99,10453.86 ccw(c16203.57,10450.38) 16198.57,10450.37 16200.05,9713.55 ; 16314.95,10568.83 ccw(c16311.35,10572.3) 16316.35,10572.3 16316.39,10681.98 ; v1(16449.86,11227.23) 16429.05,11187.85 ; 16453.37,9699.59 v1(16467.27,9713.5) ; 16200.05,9713.55 ccw(c16215.42,9713.62) 16215.37,9698.24 ; 16200.05,9713.55 ccw(c16215.42,9713.62) 16215.37,9698.24 ; 16200.05,9713.55 ccw(c16215.42,9713.62) 16215.37,9698.24 ; 16200.05,9713.55 ccw(c16215.42,9713.62) 16215.37,9698.24 ; 16200.05,9713.55 ccw(c16215.42,9713.62) 16215.37,9698.24 ; 16200.05,9713.55 ccw(c16215.42,9713.62) 16215.37,9698.24 ; 16200.05,9713.55 ccw(c16215.42,9713.62) 16215.37,9698.24 ; 16200.05,9713.55 ccw(c16215.42,9713.62) 16215.37,9698.24 ; 16200.05,9713.55 ccw(c16215.42,9713.62) 16215.37,9698.24 ; 16200.05,9713.55 ccw(c16215.42,9713.62) 16215.37,9698.24 ; 16200.05,9713.55 ccw(c16215.42,9713.62) 16215.37,9698.24 ; 16200.05,9713.55 ccw(c16215.42,9713.62) 16215.37,9698.24 ; 16200.05,9713.55 ccw(c16215.42,9713.62) 16215.37,9698.24 ; 16200.05,9713.55 ccw(c16215.42,9713.62) 16215.37,9698.24 ; 16200.05,9713.55 ccw(c16215.42,9713.62) 16215.37,9698.24 ; 16200.05,9713.55 ccw(c16215.42,9713.62) 16215.37,9698.24 ; 16215.37,9698.24 16246.75,9698.13 16435.78,9698.13 16449.87,9698.16 ; 16260.72,10979.7 ccw(c16276.06,10978.64) 16263.93,10969.2 ; 16260.72,10979.7 ccw(c16276.06,10978.64) 16263.93,10969.2 ; 16260.72,10979.7 ccw(c16276.06,10978.64) 16263.93,10969.2 ; 16260.72,10979.7 ccw(c16276.06,10978.64) 16263.93,10969.2 ; 16260.72,10979.7 ccw(c16276.06,10978.64) 16263.93,10969.2 ; 16260.72,10979.7 ccw(c16276.06,10978.64) 16263.93,10969.2 ; 16260.72,10979.7 ccw(c16276.06,10978.64) 16263.93,10969.2 ; 16260.72,10979.7 ccw(c16276.06,10978.64) 16263.93,10969.2 ; 16260.72,10979.7 ccw(c16276.06,10978.64) 16263.93,10969.2 ; 16260.72,10979.7 ccw(c16276.06,10978.64) 16263.93,10969.2 ; 16260.72,10979.7 ccw(c16276.06,10978.64) 16263.93,10969.2 ; 16260.72,10979.7 ccw(c16276.06,10978.64) 16263.93,10969.2 ; 16260.72,10979.7 ccw(c16276.06,10978.64) 16263.93,10969.2 ; 16260.72,10979.7 ccw(c16276.06,10978.64) 16263.93,10969.2 ; 16260.72,10979.7 ccw(c16276.06,10978.64) 16263.93,10969.2 ; 16260.72,10979.7 ccw(c16276.06,10978.64) 16263.93,10969.2 ; 16260.72,10979.7 16264.88,11039.79 cw(c16290.2,11038.08) 16265.01,11041.2 16270.76,11087.65 cw(c16286.01,11085.73) 16275.91,11097.31 16311.99,11128.8 16335.28,11149.07 ; 16263.93,10969.19 16314.6,10904.27 ; 16314.6,10904.27 ccw(c16318.57,10907.32) 16314.96,10903.85 ; 16314.6,10904.27 ccw(c16318.57,10907.32) 16314.96,10903.85 ; 16314.6,10904.27 ccw(c16318.57,10907.32) 16314.96,10903.85 ; 16314.6,10904.27 ccw(c16318.57,10907.32) 16314.96,10903.85 ; 16314.96,10903.85 cw(c16311.34,10900.41) 16316.34,10900.41 16316.39,10682.21 ; 16316.39,10681.98 ccw(c16291.01,10682.09) 16316.39,10682.2 ; 16316.39,10681.98 ccw(c16291.01,10682.09) 16316.39,10682.2 ; 16316.39,10681.98 ccw(c16291.01,10682.09) 16316.39,10682.2 ; 16316.39,10681.98 ccw(c16291.01,10682.09) 16316.39,10682.2 ; 16316.39,10681.98 ccw(c16291.01,10682.09) 16316.39,10682.21 ; 16335.28,11149.07 cw(c16345.4,11137.5) 16342.19,11152.53 ; 16335.28,11149.07 cw(c16345.4,11137.5) 16342.19,11152.53 ; 16335.28,11149.07 cw(c16345.4,11137.5) 16342.19,11152.53 ; 16335.28,11149.07 cw(c16345.4,11137.5) 16342.19,11152.53 ; 16335.28,11149.07 cw(c16345.4,11137.5) 16342.19,11152.53 ; 16335.28,11149.07 cw(c16345.4,11137.5) 16342.19,11152.53 ; 16335.28,11149.07 cw(c16345.4,11137.5) 16342.19,11152.53 ; 16335.28,11149.07 cw(c16345.4,11137.5) 16342.19,11152.53 ; 16335.28,11149.07 cw(c16345.4,11137.5) 16342.19,11152.53 ; 16335.28,11149.07 cw(c16345.4,11137.5) 16342.19,11152.53 ; 16335.28,11149.07 cw(c16345.4,11137.5) 16342.19,11152.53 ; 16335.28,11149.07 cw(c16345.4,11137.5) 16342.19,11152.53 ; 16335.28,11149.07 cw(c16345.4,11137.5) 16342.19,11152.53 ; 16335.28,11149.07 cw(c16345.4,11137.5) 16342.19,11152.53 ; 16335.28,11149.07 cw(c16345.4,11137.5) 16342.19,11152.53 ; 16335.28,11149.07 cw(c16345.4,11137.5) 16342.2,11152.53 ; 16342.2,11152.53 16398.52,11164.7 ; 16398.52,11164.7 ccw(c16388.94,11209.06) 16429.05,11187.85 ; 16398.52,11164.7 ccw(c16388.94,11209.06) 16429.05,11187.85 ; 16398.52,11164.7 ccw(c16388.94,11209.06) 16429.05,11187.85 ; 16398.52,11164.7 ccw(c16388.94,11209.06) 16429.05,11187.85 ; 16398.52,11164.7 ccw(c16388.94,11209.06) 16429.05,11187.85 ; 16398.52,11164.7 ccw(c16388.94,11209.06) 16429.05,11187.85 ; 16398.52,11164.7 ccw(c16388.94,11209.06) 16429.05,11187.85 ; 16398.52,11164.7 ccw(c16388.94,11209.06) 16429.05,11187.85 ; 16398.52,11164.7 ccw(c16388.94,11209.06) 16429.05,11187.85 ; 16398.52,11164.7 ccw(c16388.94,11209.06) 16429.05,11187.85 ; 16398.52,11164.7 ccw(c16388.94,11209.06) 16429.05,11187.85 ; 16398.52,11164.7 ccw(c16388.94,11209.06) 16429.05,11187.85 ; 16398.52,11164.7 ccw(c16388.94,11209.06) 16429.05,11187.85 ; 16398.52,11164.7 ccw(c16388.94,11209.06) 16429.05,11187.86 ; 16398.52,11164.7 ccw(c16388.94,11209.06) 16429.05,11187.85 ; 16398.52,11164.7 ccw(c16388.94,11209.06) 16429.05,11187.85 ; 16449.87,9698.16 ccw(c16449.86,9703.16) 16453.34,9699.57 ; 16449.87,9698.16 ccw(c16449.86,9703.16) 16453.34,9699.57 ; 16449.87,9698.16 ccw(c16449.86,9703.16) 16453.34,9699.57 ; 16449.87,9698.16 ccw(c16449.86,9703.16) 16453.34,9699.57 ; 16449.87,9698.16 ccw(c16449.86,9703.16) 16453.34,9699.57 ; 16449.87,9698.16 ccw(c16449.86,9703.16) 16453.34,9699.57 ; 16449.87,9698.16 ccw(c16449.86,9703.16) 16453.34,9699.57 ; 16449.87,9698.16 ccw(c16449.86,9703.16) 16453.34,9699.57 ; 16449.87,9698.16 ccw(c16449.86,9703.16) 16453.34,9699.57 ; 16449.87,9698.16 ccw(c16449.86,9703.16) 16453.34,9699.57 ; 16449.87,9698.16 ccw(c16449.86,9703.16) 16453.34,9699.57 ; 16449.87,9698.16 ccw(c16449.86,9703.16) 16453.34,9699.57 ; 16449.87,9698.16 ccw(c16449.86,9703.16) 16453.34,9699.57 ; 16449.87,9698.16 ccw(c16449.86,9703.16) 16453.34,9699.57 ; 16449.87,9698.16 ccw(c16449.86,9703.16) 16453.34,9699.57 ; 16449.87,9698.16 ccw(c16449.86,9703.16) 16453.34,9699.57
  Bottom 6+gnd w5: v1@16467.52,9713.75 U2.19@16467.52,9775.59
SDNE_01_7: IC2.44 U3.19 | length 1671.3
  Top Layer 1 w5: IC2.44@15120.16,10461.71 v1@15120.16,10534.31 ; v1@15159.22,10170.19 U3.19@15159.22,10232.03
  Layer 3 w5: v1(15120.09,10534.39) 15236.19,10549.64 ; v1(15158.97,10169.94) 15158.97,10396.01 ; 15236.24,10549.64 15314.71,10559.87 ; 15158.97,10396.01 cw(c15163.98,10396.01) 15161.88,10400.55 ; 15158.97,10396.01 cw(c15163.98,10396.01) 15161.88,10400.55 ; 15158.97,10396.01 cw(c15163.98,10396.01) 15161.89,10400.55 ; 15158.97,10396.01 cw(c15163.98,10396.01) 15161.88,10400.55 ; 15158.97,10396.01 cw(c15163.98,10396.01) 15161.88,10400.55 ; 15158.97,10396.01 cw(c15163.98,10396.01) 15161.89,10400.55 ; 15158.97,10396.01 cw(c15163.98,10396.01) 15161.9,10400.56 ; 15158.97,10396.01 cw(c15163.98,10396.01) 15161.89,10400.55 ; 15158.97,10396.01 cw(c15163.98,10396.01) 15161.88,10400.55 ; 15158.97,10396.01 cw(c15163.98,10396.01) 15161.88,10400.55 ; 15158.97,10396.01 cw(c15163.98,10396.01) 15161.88,10400.55 ; 15158.97,10396.01 cw(c15163.98,10396.01) 15161.88,10400.55 ; 15158.97,10396.01 cw(c15163.98,10396.01) 15161.88,10400.55 ; 15158.97,10396.01 cw(c15163.98,10396.01) 15161.88,10400.55 ; 15158.97,10396.01 cw(c15163.98,10396.01) 15161.88,10400.55 ; 15158.97,10396.01 cw(c15163.98,10396.01) 15161.88,10400.55 ; 15161.9,10400.56 15212.1,10423.39 ; 15212.1,10423.39 cw(c15218.49,10409.41) 15212.52,10423.58 ; 15212.1,10423.39 cw(c15218.49,10409.41) 15212.51,10423.58 ; 15212.1,10423.39 cw(c15218.49,10409.41) 15212.51,10423.58 ; 15212.1,10423.39 cw(c15218.49,10409.41) 15212.51,10423.58 ; 15212.1,10423.39 cw(c15218.49,10409.41) 15212.51,10423.58 ; 15212.1,10423.39 cw(c15218.49,10409.41) 15212.51,10423.58 ; 15212.1,10423.39 cw(c15218.49,10409.41) 15212.51,10423.58 ; 15212.1,10423.39 cw(c15218.49,10409.41) 15212.51,10423.58 ; 15212.1,10423.39 cw(c15218.49,10409.41) 15212.51,10423.58 ; 15212.1,10423.39 cw(c15218.49,10409.41) 15212.51,10423.58 ; 15212.1,10423.39 cw(c15218.49,10409.41) 15212.51,10423.58 ; 15212.1,10423.39 cw(c15218.49,10409.41) 15212.51,10423.58 ; 15212.1,10423.39 cw(c15218.49,10409.41) 15212.51,10423.58 ; 15212.1,10423.39 cw(c15218.49,10409.41) 15212.51,10423.58 ; 15212.1,10423.39 cw(c15218.49,10409.41) 15212.51,10423.58 ; 15212.1,10423.39 cw(c15218.49,10409.41) 15212.51,10423.58 ; 15212.52,10423.58 15284.67,10454.57 ; 15284.67,10454.57 ccw(c15258.85,10514.63) 15286.7,10455.49 ; 15284.67,10454.57 ccw(c15258.85,10514.63) 15286.7,10455.49 ; 15284.67,10454.57 ccw(c15258.85,10514.63) 15286.7,10455.49 ; 15284.67,10454.57 ccw(c15258.85,10514.63) 15286.7,10455.49 ; 15284.67,10454.57 ccw(c15258.85,10514.63) 15286.7,10455.49 ; 15286.7,10455.49 15382.23,10500.48 ; 15314.71,10559.87 cw(c15316.7,10544.63) 15320.55,10559.51 ; 15314.71,10559.87 cw(c15316.7,10544.63) 15320.55,10559.51 ; 15314.71,10559.87 cw(c15316.7,10544.63) 15320.55,10559.51 ; 15314.71,10559.87 cw(c15316.7,10544.63) 15320.55,10559.51 ; 15314.71,10559.87 cw(c15316.7,10544.63) 15320.55,10559.51 ; 15314.71,10559.87 cw(c15316.7,10544.63) 15320.55,10559.51 ; 15314.71,10559.87 cw(c15316.7,10544.63) 15320.55,10559.51 ; 15314.71,10559.87 cw(c15316.7,10544.63) 15320.55,10559.51 ; 15314.71,10559.87 cw(c15316.7,10544.63) 15320.55,10559.51 ; 15314.71,10559.87 cw(c15316.7,10544.63) 15320.55,10559.51 ; 15314.71,10559.87 cw(c15316.7,10544.63) 15320.55,10559.51 ; 15314.71,10559.87 cw(c15316.7,10544.63) 15320.55,10559.51 ; 15314.71,10559.87 cw(c15316.7,10544.63) 15320.55,10559.51 ; 15314.71,10559.87 cw(c15316.7,10544.63) 15320.55,10559.51 ; 15314.71,10559.87 cw(c15316.7,10544.63) 15320.55,10559.51 ; 15314.71,10559.87 cw(c15316.7,10544.63) 15320.55,10559.51 ; 15320.55,10559.51 15360.15,10549.28 ; 15360.15,10549.28 cw(c15356.31,10534.39) 15367.35,10545.09 ; 15360.15,10549.28 cw(c15356.31,10534.39) 15367.35,10545.09 ; 15360.15,10549.28 cw(c15356.31,10534.39) 15367.35,10545.09 ; 15360.15,10549.28 cw(c15356.31,10534.39) 15367.35,10545.09 ; 15360.15,10549.28 cw(c15356.31,10534.39) 15367.35,10545.09 ; 15360.15,10549.28 cw(c15356.31,10534.39) 15367.35,10545.09 ; 15360.15,10549.28 cw(c15356.31,10534.39) 15367.35,10545.09 ; 15360.15,10549.28 cw(c15356.31,10534.39) 15367.35,10545.09 ; 15360.15,10549.28 cw(c15356.31,10534.39) 15367.35,10545.09 ; 15360.15,10549.28 cw(c15356.31,10534.39) 15367.35,10545.09 ; 15360.15,10549.28 cw(c15356.31,10534.39) 15367.35,10545.09 ; 15360.15,10549.28 cw(c15356.31,10534.39) 15367.35,10545.09 ; 15360.15,10549.28 cw(c15356.31,10534.39) 15367.35,10545.09 ; 15360.15,10549.28 cw(c15356.31,10534.39) 15367.35,10545.09 ; 15360.15,10549.28 cw(c15356.31,10534.39) 15367.35,10545.09 ; 15360.15,10549.28 cw(c15356.31,10534.39) 15367.35,10545.09 ; 15367.35,10545.09 15386.72,10525.09 ; 15382.23,10500.48 ccw(c15375.68,10514.39) 15386.72,10525.09 ; 15382.23,10500.48 ccw(c15375.68,10514.39) 15386.72,10525.09 ; 15382.23,10500.48 ccw(c15375.68,10514.39) 15386.72,10525.09 ; 15382.23,10500.48 ccw(c15375.68,10514.39) 15386.72,10525.09 ; 15382.23,10500.48 ccw(c15375.68,10514.39) 15386.72,10525.09 ; 15382.23,10500.48 ccw(c15375.68,10514.39) 15386.72,10525.09 ; 15382.23,10500.48 ccw(c15375.68,10514.39) 15386.72,10525.09 ; 15382.23,10500.48 ccw(c15375.68,10514.39) 15386.72,10525.09 ; 15382.23,10500.48 ccw(c15375.68,10514.39) 15386.72,10525.09 ; 15382.23,10500.48 ccw(c15375.68,10514.39) 15386.72,10525.09 ; 15382.23,10500.48 ccw(c15375.68,10514.39) 15386.72,10525.09 ; 15382.23,10500.48 ccw(c15375.68,10514.39) 15386.72,10525.09 ; 15382.23,10500.48 ccw(c15375.68,10514.39) 15386.72,10525.09 ; 15382.23,10500.48 ccw(c15375.68,10514.39) 15386.72,10525.09 ; 15382.23,10500.48 ccw(c15375.68,10514.39) 15386.72,10525.09 ; 15382.23,10500.48 ccw(c15375.68,10514.39) 15386.72,10525.09
SDNE_11_7: IC2.136 U4.19 | length 2128.5
  Top Layer 1 w5: IC2.136@15139.69,11307.38 15140.52,11306.55 15140.52,11235.13 v1(15141.35,11234.3)
  Layer 3 w5: 15064.49,9693.94 14938.45,9693.94 14907.26,9694.05 14907.07,9694.05 cw(c14907.12,9709.43) 14891.75,9709.4 14890.27,10445.04 cw(c14895.27,10445.04) 14891.74,10448.57 14932.9,10489.7 cw(c14943.5,10479.09) 14933.69,10490.44 14985.7,10535.42 ccw(c14962.57,10562.18) 14997.81,10559.1 15007.99,10675.69 ccw(c14982.71,10677.89) 15008.01,10675.91 15008.02,10676.06 ccw(c14982.71,10677.9) 15008.09,10677.9 15008.09,10815.26 15008.09,10855.29 ccw(c14982.71,10855.26) 15003.8,10869.37 14937.54,10968.94 cw(c14941.7,10971.71) 14936.7,10971.71 14936.7,11090.76 cw(c14941.7,11090.76) 14938.16,11094.3 15007.14,11163.27 15070.32,11163.27 v1(15141.35,11234.3) ; 15064.53,9693.94 15127.56,9694.1 ccw(c15127.48,9709.47) 15134.9,9696 v1(15158.97,9709.31)
  Bottom 6+gnd w5: v1@15159.22,9709.56 U4.19@15159.22,9771.4